# Altium PCB Front.PcbDoc
Units mm, origin at the board's own origin, x right, y up, seen from the top; angles counter-clockwise.
Board outline 49.6 x 20 mm, 2 copper layers (Top Layer, Bottom Layer), stack 1.57 mm thick; 29 components, 36 nets, 182 pads, 202 vias.
Unrouted connection lines stored in the file: 1.
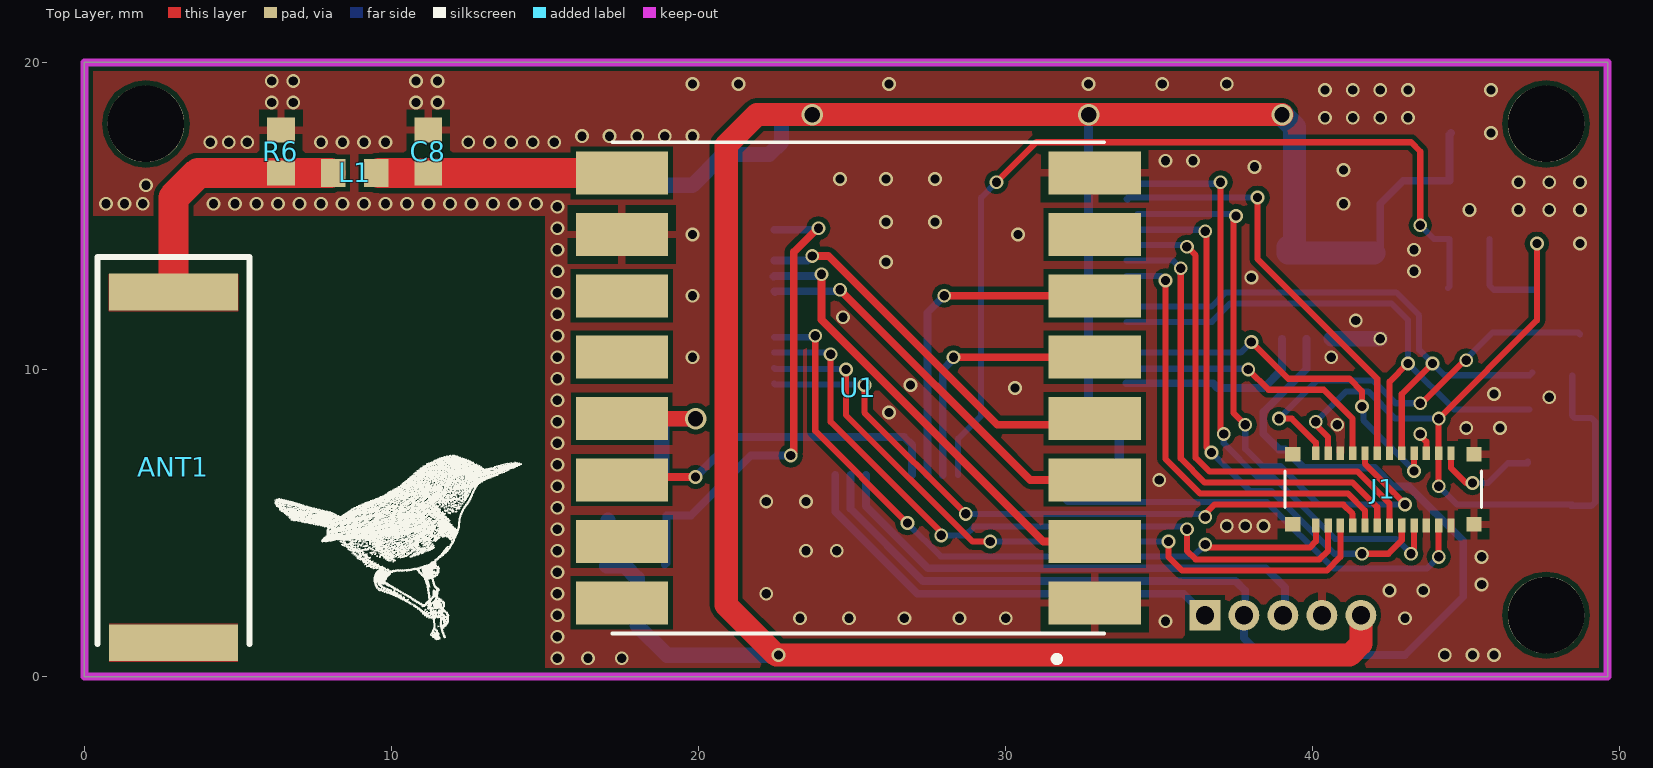
[diagram p0: Top Layer view]
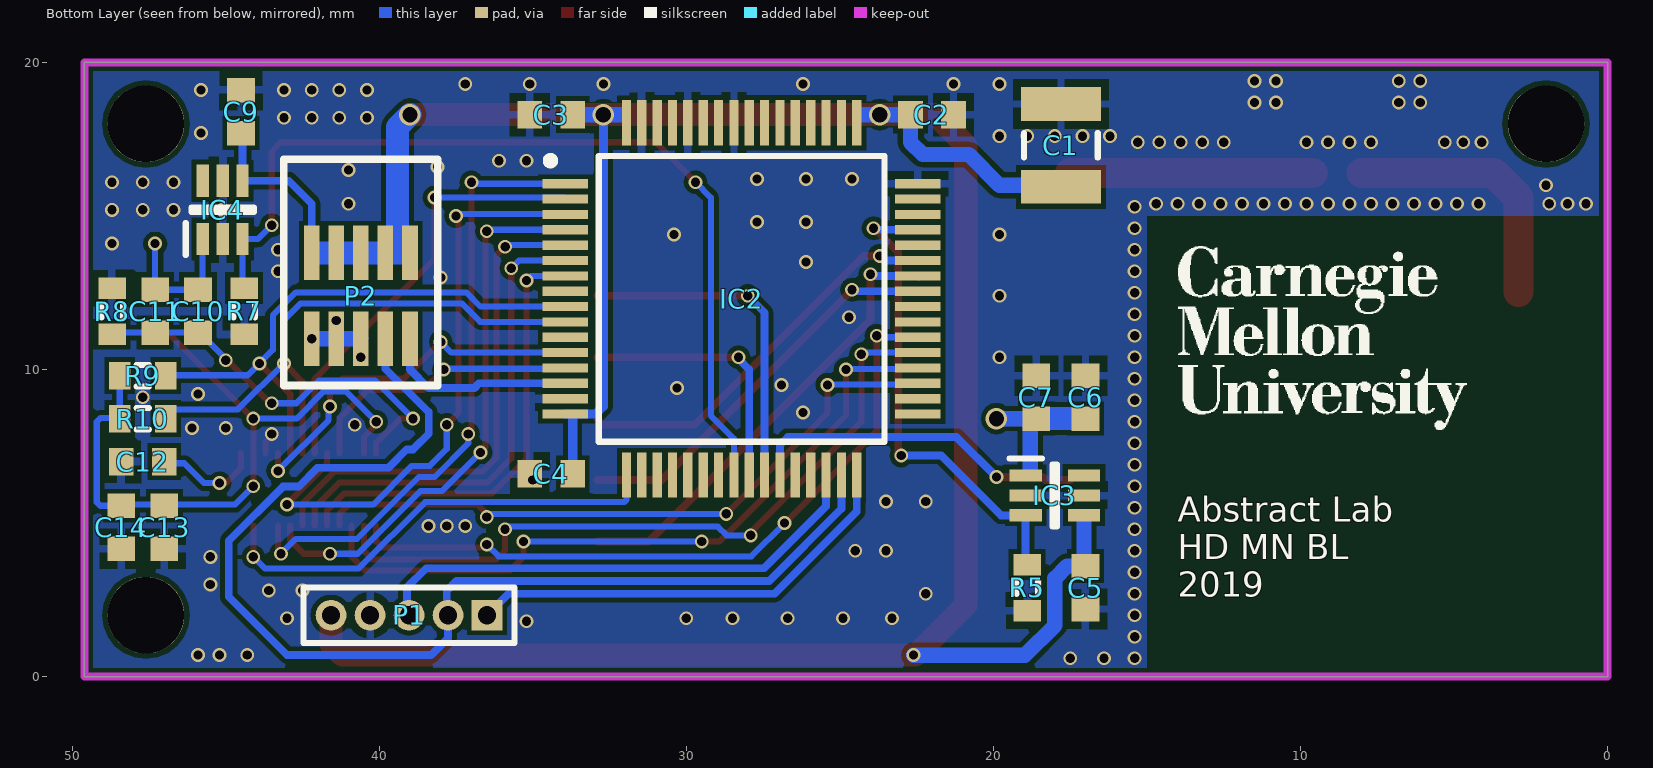
[diagram p1: Bottom Layer view, seen from below]

## Layer stack, top to bottom
Top Solder: solder mask 0.0102, Solder Resist, Dk 3.5
Top Layer: signal copper 0.035
Dielectric 1: dielectric 1.5, FR-4, Dk 3.9
Bottom Layer: signal copper 0.035
Bottom Solder: solder mask 0.0102, Solder Resist, Dk 3.5

## Board outline
0,0 49.6,0 49.6,20 0,20

## Design rules (kind name [scope] priority, off if disabled: settings)
Clearance [All] p1: gap=0.16 ignorepadtopadclearanceinfootprint=FALSE
MaxMinImpedance "Schematic Impedance Constraint_2" [InNet('NetANT1_1')] p1: minimum=50.00 maximum=50.00
MaxMinImpedance "Schematic Impedance Constraint" [InNet('ANT')] p2: minimum=50.00 maximum=50.00
MinimumSolderMaskSliver [All] p1: minsoldermaskwidth=0.16
PlaneClearance [All] p1: clearance=0.254
PlaneConnect [All] p1: pad.planeconnectstyle=Relief pad.reliefexpansion=0.508 pad.reliefentries=4 pad.reliefconductorwidth=0.254 pad.reliefairgap=0.254 via.planeconnectstyle=Direct via.reliefexpansion=0.508 via.reliefentries=4 via.reliefconductorwidth=0.254 via.reliefairgap=0.254
PolygonConnect [All] p1: thpad.connectstyle=Relief thpad.reliefconductorwidth=0.254 thpad.reliefentries=4 thpad.polygonreliefangle="90 Angle" thpad.airgapwidth=0.254 smdpad.connectstyle=Relief smdpad.reliefconductorwidth=0.254 smdpad.reliefentries=4 smdpad.polygonreliefangle="90 Angle" smdpad.airgapwidth=0.254 via.connectstyle=Direct via.reliefconductorwidth=0.254 via.reliefentries=4 via.polygonreliefangle="90 Angle" via.airgapwidth=0.254
RoutingVias [All] p1: holewidth=0.3 width=0.45 viastyle="Through Hole" minholewidth=0.3 minwidth=0.45 maxholewidth=6.5 maxwidth=5
SolderMaskExpansion [All] p1: expansion=0.102
Width CAM [InNet('Cam*') or InNet('AGND') or InNet('DVDD') or InNet('SCL')or InNet('SDA')] p1: maxlimit=1 minlimit=0.17 preferedwidth=0.2
Width MatchedLine [InNet('ANT') OR InNet('NetANT1_1')] p2: maxlimit=2 minlimit=0.254 preferedwidth=0.99
Width [All] p3: maxlimit=5 minlimit=0.16 preferedwidth=0.254
27 further rules are at their usual default settings.

## Components (designator, comment, footprint, x,y, rotation, side; value= is the part's Value field where it differs from the comment)
ANT1 "ACAG1204-868-T" ANTC12040X170N 2.9,6.815 r270 top
C1 "" C1210 17.8,17.3 r90 bottom value=10uF
C2 "Cap" 1608[0603] 22,18.3 r0 bottom value=100nF
C3 "Cap" 1608[0603] 34.4,18.3 r180 bottom value=100nF
C4 "Cap" 1608[0603] 34.4,6.6 r180 bottom value=100nF
C5 "Cap" 1608[0603] 17,2.9 r90 bottom value=10uF
C6 "Cap" 1608[0603] 17,9.1 r270 bottom value=10uF
C7 "Cap" 1608[0603] 18.6,9.1 r270 bottom value=1uF
C8 "" 1608[0603] 11.2,17.1 r270 top value=3.9pF
C9 "Cap" 1608[0603] 44.5,18.4 r270 bottom value=10uF
C10 "Cap" 1608[0603] 45.9,11.9 r90 bottom value=0.1uF
C11 "Cap" 1608[0603] 47.3,11.9 r90 bottom value=10uF
C12 "Cap" 1608[0603] 47.7,7 r180 bottom value=0.1uF
C13 "Cap" 1608[0603] 47,4.863 r90 bottom value=0.1uF
C14 "Cap" 1608[0603] 48.4,4.863 r90 bottom value=10uF
IC2 "MSP430FR5994IPM" QFP50P1200X1200X160-64N 28.2,12.3 r180 bottom
IC3 "SIP32431DR3-T1GE3" SOT65P210X110-6N 18,5.9 r180 bottom
IC4 "SIP32431DR3-T1GE3" SOT65P210X110-6N 45.1,15.2 r90 bottom
J1 "503772-2420" 5037722410 42.3,6.1 r0 top
L1 "" 1608[0603] 8.8,16.4 r180 top value=4.7nH
P1 "Header 5" MHDR1X5 36.49,2 r0 bottom
P2 "Header 5X2" FTE-105-03-X-DH 40.6,12.4 r0 bottom
R5 "Res3" J1-0603 18.9,2.9 r90 bottom value=2M
R6 "" 1608[0603] 6.4,17.1 r270 top value=NP
R7 "Res3" J1-0603 44.4,11.9 r90 bottom value=2M
R8 "Res3" J1-0603 48.7,11.9 r90 bottom value=0
R9 "Res3" J1-0603 47.7,9.8 r0 bottom value=4.7k
R10 "Res3" J1-0603 47.7,8.4 r0 bottom value=4.7k
U1 "RFM95W-915S2" *XCVR_RFM69HW-868S2 25.2,9.4 r180 top

## Footprints (in the part's own frame and the unit in brackets; to place one, negate y for a bottom-side part, rotate by r counter-clockwise, add the part's x,y. Pads: shape width x height; smd on the part's side, far side on the other; paste and mask are expansions set on the pad)
1608[0603] [mm] "Chip Capacitor, Body 1.6x0.8mm, IPC High Density"
  rect 0.8x0.9 smd: 1(-0.7,0) 2(0.7,0)
  body extent -0.87,-0.48 0.87,0.48, height 1.3
5037722410 [mm]
  rect 0.24x0.45 smd: 1(-2.2,-1.175) 2(-2.2,1.175) 3(-1.8,-1.175) 4(-1.8,1.175) 5(-1.4,-1.175) 6(-1.4,1.175) 7(-1,-1.175) 8(-1,1.175) 9(-0.6,-1.175) 10(-0.6,1.175) 11(-0.2,-1.175) 12(-0.2,1.175) 13(0.2,-1.175) 14(0.2,1.175) 15(0.6,-1.175) 16(0.6,1.175) 17(1,-1.175) 18(1,1.175) 19(1.4,-1.175) 20(1.4,1.175) 21(1.8,-1.175) 22(1.8,1.175) 23(2.2,-1.175) 24(2.2,1.175)
  rect 0.5x0.47 smd: FN1(-2.95,1.145) FN2(-2.95,-1.145) FN3(2.95,-1.145) FN4(2.95,1.145)
  silkscreen extent -3.2,-0.6 3.2,0.6
*XCVR_RFM69HW-868S2 [mm]
  rect 3x1.4 smd: 1(-7.7,7) 2(-7.7,5) 3(-7.7,3) 4(-7.7,1) 5(-7.7,-1) 6(-7.7,-3) 7(-7.7,-5) 8(-7.7,-7) 9(7.7,-7) 10(7.7,-5) 11(7.7,-3) 12(7.7,-1) 13(7.7,1) 14(7.7,3) 15(7.7,5) 16(7.7,7)
  silkscreen extent -8,-8 8,8.93, body extent -8,-8 8,8, height 2.04
ANTC12040X170N [mm]
  rect 1.2x4.2 smd: 1(-5.715,0) 2(5.715,0)
  silkscreen extent -6.85,-2.47 5.75,2.47, body extent -6,-2 6,2, height 1.7
C1210 [mm] "Chip Capacitor, Body 3.2x2.5mm, IPC High Density"
  rect 1.1x2.6 smd: 1(-1.35,0) 2(1.35,0)
  silkscreen extent -0.4,-1.2 0.4,1.2, body extent -1.7,-1.35 1.7,1.35, height 1.3
FTE-105-03-X-DH [mil]
  rect 20x70 smd mask+2: 1(-63,-55) 2(-63,55) 3(-31.5,-55) 4(-31.5,55) 5(0,-55) 6(0,55) 7(31.5,-55) 8(31.5,55) 9(63,-55) 10(63,55)
  silkscreen extent -99,-175 99,115, body extent -79,-300 79,75, height 120
J1-0603 [mm] "Chip Resistor, Body 1.6x0.8mm, IPC High Density"
  rect 0.7x0.9 smd: 1(-0.75,0) 2(0.75,0)
  silkscreen extent -0.2,-0.35 0.2,0.35, body extent -0.85,-0.48 0.85,0.48, height 0.9
MHDR1X5 [mm] "Connector; Header; 5 Position"
  rect 1x1 hole 0.6: 1(0,0)
  round 1 hole 0.6: 2(1.27,0) 3(2.54,0) 4(3.81,0) 5(5.08,0)
  silkscreen extent -0.9,-0.9 5.98,0.9
QFP50P1200X1200X160-64N [mm]
  rect 1.475x0.3 smd: 1(-5.738,3.75) 2(-5.738,3.25) 3(-5.738,2.75) 4(-5.738,2.25) 5(-5.738,1.75) 6(-5.738,1.25) 7(-5.738,0.75) 8(-5.738,0.25) 9(-5.738,-0.25) 10(-5.738,-0.75) 11(-5.738,-1.25) 12(-5.738,-1.75) 13(-5.738,-2.25) 14(-5.738,-2.75) 15(-5.738,-3.25) 16(-5.738,-3.75) 33(5.738,-3.75) 34(5.738,-3.25) 35(5.738,-2.75) 36(5.738,-2.25) 37(5.738,-1.75) 38(5.738,-1.25) 39(5.738,-0.75) 40(5.738,-0.25) 41(5.738,0.25) 42(5.738,0.75) 43(5.738,1.25) 44(5.738,1.75) 45(5.738,2.25) 46(5.738,2.75) 47(5.738,3.25) 48(5.738,3.75)
  rect 0.3x1.475 smd: 17(-3.75,-5.738) 18(-3.25,-5.738) 19(-2.75,-5.738) 20(-2.25,-5.738) 21(-1.75,-5.738) 22(-1.25,-5.738) 23(-0.75,-5.738) 24(-0.25,-5.738) 25(0.25,-5.738) 26(0.75,-5.738) 27(1.25,-5.738) 28(1.75,-5.738) 29(2.25,-5.738) 30(2.75,-5.738) 31(3.25,-5.738) 32(3.75,-5.738) 49(3.75,5.738) 50(3.25,5.738) 51(2.75,5.738) 52(2.25,5.738) 53(1.75,5.738) 54(1.25,5.738) 55(0.75,5.738) 56(0.25,5.738) 57(-0.25,5.738) 58(-0.75,5.738) 59(-1.25,5.738) 60(-1.75,5.738) 61(-2.25,5.738) 62(-2.75,5.738) 63(-3.25,5.738) 64(-3.75,5.738)
  silkscreen extent -6.35,-4.65 4.65,4.65, body extent -6,-6 6,6, height 1.6
SOT65P210X110-6N [mm]
  rect 1.05x0.4 smd: 1(-0.95,0.65) 2(-0.95,0) 3(-0.95,-0.65) 4(0.95,-0.65) 5(0.95,0) 6(0.95,0.65)
  silkscreen extent -1.48,-1.01 0.08,1.2, body extent -1.05,-1.01 1.05,1.01, height 1.1

## Part data
ANT1: "Antenna", Manufacturer_Name=ABRACON, Mouser Part Number=815-G1204-868-T, Datasheet Link=https://componentsearchengine.com/Datasheets/1/ACAG1204-868-T.pdf, Height=1.7mm, Manufacturer_Part_Number=ACAG1204-868-T, Mouser Price/Stock=https://www.mouser.com/Search/Refine.aspx?Keyword=815-G1204-868-T
C1: library part "Cap Pol3", "Polarized Capacitor (Surface Mount)", LatestRevisionDate=29-May-2009, LatestRevisionNote="IPC-7351 Footprint Added.", PackageDescription="Chip Capacitor", PackageReference=C0805, Published=8-Jun-2000, Publisher="Altium Limited"
C2 C3 C4 C5 C6 C7 C9 C10 C11 C12 C13 C14: "CAP CER 6.3V X5R/X7R 0603", PackageDescription="Chip Capacitor, Body 1.6x0.8mm, IPC High Density", PackageReference=0603, Publisher="Altium Limited"
C8: library part Cap, "Capacitor", LatestRevisionDate=17-Jul-2002, LatestRevisionNote="Re-released for DXP Platform.", PackageDescription="Radial Cap, Thru-Hole; 2 Leads; 0.3 in Pin Spacing", PackageReference=RAD-0.3, Published=8-Jun-2000, Publisher="Altium Limited"
IC2: "Integrated Circuit", Manufacturer_Name="Texas Instruments", Mouser Part Number=595-MSP430FR5994IPM, Datasheet Link=http://www.ti.com/lit/gpn/msp430fr5994, Height=1.6mm, Manufacturer_Part_Number=MSP430FR5994IPM, Mouser Price/Stock=https://www.mouser.com/Search/Refine.aspx?Keyword=595-MSP430FR5994IPM
IC3 IC4: "10 pA, Ultra Low Leakage and Quiescent Current, / Load Switch with Reverse Blocking", Manufacturer_Name=Vishay, Mouser Part Number=781-SIP32431DR3-GE3, ComponentLink1Description=Datasheet, ComponentLink1URL=https://www.vishay.com/docs/66597/sip32431.pdf, ComponentLink2Description="Package Specification", ComponentLink2URL=https://www.vishay.com/docs/71154/71154.pdf, ComponentLink3Description="Manufacturer URL", ComponentLink3URL=https://www.vishay.com, Datasheet Link=https://componentsearchengine.com/Datasheets/1/SIP32431DR3-T1GE3.pdf, Height=1.1mm, Manufacturer_Part_Number=SIP32431DR3-T1GE3, Mouser Price/Stock=https://www.mouser.com/Search/Refine.aspx?Keyword=781-SIP32431DR3-GE3
J1: library part 503772-2410, "SlimStack Board-to-Board Connector. 0.40mm Pitch, B8 Series, Receptacle, 0.80mm Mated Height, 2.50mm Mated Width, 24 Circuits", Manufacturer_Name=Molex, Mouser Part Number=538-503772-2410, ComponentLink1Description="Package Specification", ComponentLink1URL=https://www.molex.com/pdm_docs/sd/5037722420_sd.pdf, ComponentLink2Description="Manufacturer URL", ComponentLink2URL=https://www.molex.com, ComponentLink3Description=Datasheet, ComponentLink3URL=https://www.molex.com/webdocs/datasheets/pdf/en-us/5037722420_PCB_RECEPTACLES.pdf, Datasheet Link=https://componentsearchengine.com/Datasheets/1/503772-2410.pdf, Height=0.76mm, Manufacturer_Part_Number=503772-2410, Mouser Price/Stock=https://www.mouser.com/Search/Refine.aspx?Keyword=538-503772-2410
L1: library part Inductor, "Inductor", Code_IEC=1005, Code_JEITA=0402, LatestRevisionDate=29-May-2009, LatestRevisionNote="IPC-7351 Footprint Added.", PackageDescription="Chip Inductor", PackageReference=0402-A, Published=8-Jun-2000, Publisher="Altium Limited"
P1: "Header, 5-Pin", LatestRevisionDate=17-Jul-2002, LatestRevisionNote="Re-released for DXP Platform.", Publisher="Altium Limited"
P2: "Header, 5-Pin, Dual row", LatestRevisionDate=17-Jul-2002, LatestRevisionNote="Re-released for DXP Platform.", Publisher="Altium Limited"
R5 R7 R8 R9 R10: "RES 1/10W 1% 0603 SMD", PackageDescription="Chip Resistor, Body 1.6x0.8mm, IPC High Density", PackageReference=0603, Publisher="Altium Limited"
R6: library part Res3, "Resistor", LatestRevisionDate=29-May-2009, LatestRevisionNote="IPC-7351 Footprint Added.", PackageDescription="Chip Resistor", PackageReference=J1-0603, Published=8-Jun-2000, Publisher="Altium Limited"
U1: "RFM95W LoRA Transceiver Module 915MHz", Package="SMD-16 RF Solutions", Availability=Unavailable, MF="RF Solutions", MP=RFM95W-915S2, Price=None, SnapEDA_Link=https://www.snapeda.com/parts/RFM95W-915S2/RF%20Solutions/view-part/?ref=snap

## Free pads (board coordinates)
  round 2.5 hole 2.5 unplated: 1(2,18) 2(47.6,18) 3(47.6,2)

## Via types
v1: diameter 0.45, hole 0.3, Top Layer to Bottom Layer, tented both sides, 198 vias
v2: diameter 0.7, hole 0.5, Top Layer to Bottom Layer, tented both sides, 4 vias

## Nets (pads, with @x,y where several pads share a name; then routed paths per layer and width w, separated by ;. In a path a pad name is that pad's centre, name@x,y a point inside that pad or via, vN(x,y) a via of type N, cw(c..) or ccw(c..) an arc to the next point about the centre after c; other vN are vias at no path point)
AGND: C10.1 C11.1 J1.2 R8.1 | length 13.5
  Top Layer w0.2: v1(38.9,8.4) 39.314,8.4 40.1,7.614 J1.2 ; v1(43.5,8.9) 43.55,8.9 44.95,10.3 v1(45,10.3)
  Bottom Layer w0.2: v1(38.9,8.4) 40.145,9.645 41.95,9.645 42.695,8.9 v1(43.5,8.9) ; v1(45,10.3) 45,10.35 45.85,11.2 C10.1 48.65,11.2 R8.1
ANT: C8.2 L1.1 U1.9 | length 7.9
  Top Layer w0.99: L1.1@9.6,16.4 C8.2 U1.9
CAM_CLK: IC2.17 J1.21 | length 15.1
  Top Layer w0.2: v1(44.1,3.9) J1.21
  Bottom Layer w0.2: IC2.17 31.95,5.75 32.015,5.685 38.506,5.685 40.676,3.515 43.715,3.515 v1(44.1,3.9)
CAM_D0: IC2.4 J1.15 | length 18.1
  Top Layer w0.2: v1(36.5,14.5) 36.545,14.455 36.545,7.455 v1(36.7,7.3) ; v1(41.6,4) 42.461,4 42.9,4.439 J1.15
  Bottom Layer w0.2: IC2.4 36.45,14.55 v1(36.5,14.5) ; v1(36.7,7.3) 37.955,6.045 38.655,6.045 40.7,4 v1(41.6,4)
CAM_D1: IC2.5 J1.13 | length 16.6
  Top Layer w0.2: v1(35.9,14) 36.185,13.715 36.185,7.129 36.634,6.68 41.447,6.68 42.5,5.627 J1.13
  Bottom Layer w0.2: IC2.5 35.85,14.05 v1(35.9,14)
CAM_D2: IC2.6 J1.11 | length 15.7
  Top Layer w0.2: v1(35.7,13.3) 35.7,7.105 36.485,6.32 41.298,6.32 42.1,5.518 J1.11
  Bottom Layer w0.2: IC2.6 35.45,13.55 v1(35.7,13.3)
CAM_D3: IC2.7 J1.9 | length 14.8
  Top Layer w0.2: v1(35.2,12.9) 35.2,7.096 36.336,5.96 41.149,5.96 41.7,5.409 J1.9
  Bottom Layer w0.2: IC2.7 35.05,13.05 v1(35.2,12.9)
CAM_D4: IC2.35 J1.7 | length 21.9
  Top Layer w0.2: v1(25.4,9.5) 25.4,8.6 v1(28.7,5.3) ; v1(36.5,5.2) 36.5,5.3 36.8,5.6 41,5.6 41.3,5.3 J1.7
  Bottom Layer w0.2: IC2.35 22.497,9.515 25.385,9.515 v1(25.4,9.5) ; v1(28.7,5.3) 36.4,5.3 v1(36.5,5.2)
CAM_D5: IC2.36 J1.5 | length 23.5
  Top Layer w0.2: v1(24.8,10) 24.8,8.514 28.914,4.4 v1(29.5,4.4) ; v1(35.3,4.4) 35.3,3.9 35.745,3.455 40.455,3.455 40.9,3.9 J1.5
  Bottom Layer w0.2: IC2.36 22.497,10.015 24.785,10.015 v1(24.8,10) ; v1(29.5,4.4) v1(35.3,4.4)
CAM_D6: IC2.37 J1.3 | length 23.8
  Top Layer w0.2: v1(24.3,10.5) 24.3,8.3 27.9,4.7 v1(27.9,4.6) ; v1(35.9,4.8) 35.9,4.1 36.185,3.815 40.215,3.815 40.5,4.1 J1.3
  Bottom Layer w0.2: IC2.37 24.25,10.55 v1(24.3,10.5) ; v1(27.9,4.6) 28.686,4.6 28.971,4.885 35.815,4.885 v1(35.9,4.8)
CAM_D7: IC2.38 J1.1 | length 23.3
  Top Layer w0.2: v1(23.8,11.1) 23.8,8 v1(26.8,5) ; v1(36.5,4.3) 36.6,4.2 39.9,4.2 40.1,4.4 J1.1
  Bottom Layer w0.2: IC2.38 23.75,11.05 v1(23.8,11.1) ; v1(26.8,5) 27.885,3.915 36.115,3.915 v1(36.5,4.3)
CAM_EN: IC2.24 IC4.3 R7.2 | length 29.7
  Top Layer w0.2: v1(29.7,16.1) 31,17.4 43.2,17.4 43.5,17.1 v1(43.5,14.7)
  Bottom Layer w0.2: IC2.24 28.45,7.75 29.2,8.5 29.2,15.6 v1(29.7,16.1) ; v1(43.5,14.7) 43.95,14.25 IC4.3 44.45,12.7 R7.2
CAM_FVLD: IC2.3 J1.10 | length 19.2
  Top Layer w0.2: v1(37.5,15) 37.5,14.932 37.415,14.847 37.415,8.585 v1(37.8,8.2) ; J1.10 41.7,6.936 43,5.637 v1(43,5.6)
  Bottom Layer w0.2: IC2.3@34.3,15.06 37.44,15.06 v1(37.5,15) ; v1(37.8,8.2) 37.8,7.413 38.353,6.86 38.94,6.86 40.2,5.6 v1(43,5.6)
CAM_INTR: IC2.12 J1.18 | length 12.3
  Top Layer w0.2: v1(38,10.9) 39.2,9.7 41.2,9.7 41.6,9.3 v1(41.6,8.8) ; v1(43.3,6.7) J1.18
  Bottom Layer w0.2: IC2.12 37.65,10.55 v1(38,10.9) ; v1(41.6,8.8) 41.648,8.752 41.648,8.352 v1(43.3,6.7)
CAM_LVLD: IC2.2 J1.12 | length 14.3
  Top Layer w0.2: v1(38.2,15.6) 38.2,13.6 42.1,9.7 J1.12
  Bottom Layer w0.2: IC2.2@33.963,15.525 IC2.2 33.988,15.6 v1(38.2,15.6)
CAM_PCLK: IC2.1 J1.17 | length 20.2
  Top Layer w0.2: v1(37,16.1) 37,8 v1(37.1,7.9) ; v1(43.2,4) 43.2,4.068 43.3,4.168 J1.17
  Bottom Layer w0.2: IC2.1 36.95,16.05 v1(37,16.1) ; v1(37.1,7.9) 37.1,7.6 38.2,6.5 38.709,6.5 40.724,4.485 42.715,4.485 v1(43.2,4)
CAM_TRIG: IC2.13 J1.8 | length 9.2
  Top Layer w0.2: v1(37.9,10) 38.56,9.34 40.36,9.34 41.3,8.4 J1.8
  Bottom Layer w0.2: IC2.13 33.963,10.025 37.875,10.025 v1(37.9,10)
CAM_VCC: C10.2 C11.2 C13.2 C14.2 IC4.1 J1.4 J1.22 R9.2 R10.2 | length 30.1
  Top Layer w0.2: v1(40.1,8.3) 40.1,8.2 40.5,7.8 J1.4 ; v1(44.1,6.2) J1.22 v1(44.1,8.4) 47.3,11.6 v1(47.3,14.1)
  Bottom Layer w0.2: v1(40.1,8.3) 41.085,9.285 41.801,9.285 42.686,8.4 v1(44.1,8.4) ; v1(44.1,6.2) 44.7,5.6 48.463,5.6 C14.2@48.5,5.563 ; IC4.1 45.75,12.75 C10.2 C11.2 v1(47.3,14.1) ; C14.2 C14.2@48.5,5.563 ; R9.2 48.45,8.5 48.533,8.417 49.083,8.417 49.2,8.3 49.2,5.68 49.083,5.563 C14.2@48.5,5.563
DVDD: C12.2 J1.24 | length 3.5
  Top Layer w0.2: J1.24 44.5,6.8 45,6.3 v1(45.2,6.3)
  Bottom Layer w0.2: v1(45.2,6.3) 45.7,6.3 46.35,6.95 47,6.95 C12.2
GND: C1.2 C2.1 C3.1 C4.1 C5.1 C6.1 C7.1 C8.1 C9.1 C12.1 C13.1 C14.1 IC2.15 IC2.48 IC2.57 IC2.60 IC2.63 IC3.2 IC3.5 IC4.2 IC4.5 J1.6 J1.19 J1.20 J1.23 J1.FN1 J1.FN2 J1.FN3 J1.FN4 P1.4 P2.6 P2.8 P2.10 R5.1 R6.1 R7.1 R8.2 U1.1 U1.8 U1.10 | length 2.3
  Top Layer w0.2: v1@43.5,7.847 43.7,7.647 J1.20
  Top Layer w0.254: v1@43.5,7.847 v1(43.5,7.9)
  Bottom Layer w0.5: P2.6 P2.8 v1(42.2,11.003)
  other v1: 15.4,0.6 16.4,0.6 17.5,0.6 44.3,0.7 45.2,0.7 45.9,0.7 15.4,1.3 35.2,1.8 23.3,1.9 24.9,1.9 26.7,1.9 28.5,1.9 30,1.9 43,1.9 15.4,2 15.4,2.7 22.2,2.7 42.5,2.8 43.6,2.8 45.5,3 15.4,3.4 45.5,3.9 15.4,4.1 23.5,4.1 24.5,4.1 15.4,4.8 37.2,4.9 37.8,4.9 38.4,4.9 15.4,5.5 22.2,5.7 23.5,5.7 15.4,6.2 35,6.4 15.4,6.9 15.4,7.6 45,8.1 46.1,8.1 40.8,8.2 15.4,8.3 26.2,8.6 15.4,9 47.7,9.1 45.9,9.2 30.3,9.4 26.9,9.5 15.4,9.7 15.4,10.4 19.8,10.4 40.6,10.4 15.4,11.1 41.4,11.6 24.7,11.7 15.4,11.8 19.8,12.4 15.4,12.5 38,13 15.4,13.2 43.3,13.2 26.1,13.5 15.4,13.9 43.3,13.9 48.7,14.1 19.8,14.4 30.4,14.4 15.4,14.6 26.1,14.8 27.7,14.8 45.1,15.2 46.7,15.2 47.7,15.2 48.7,15.2 15.4,15.3 0.7,15.4 1.3,15.4 1.9,15.4 4.2,15.4 4.9,15.4 5.6,15.4 6.3,15.4 7,15.4 7.7,15.4 8.4,15.4 9.1,15.4 9.8,15.4 10.5,15.4 11.2,15.4 11.9,15.4 12.6,15.4 13.3,15.4 14,15.4 14.7,15.4 41,15.4 2,16 46.7,16.1 47.7,16.1 48.7,16.1 24.6,16.2 26.1,16.2 27.7,16.2 41,16.5 38.1,16.6 35.2,16.8 36.1,16.8 4.1,17.4 4.7,17.4 5.3,17.4 7.7,17.4 8.4,17.4 9.1,17.4 9.8,17.4 12.5,17.4 13.2,17.4 13.9,17.4 14.6,17.4 15.3,17.4 16.2,17.6 17.1,17.6 18,17.6 18.9,17.6 19.8,17.6 45.8,17.7 40.4,18.2 41.3,18.2 42.2,18.2 43.1,18.2 6.1,18.7 6.8,18.7 10.8,18.7 11.5,18.7 40.4,19.1 41.3,19.1 42.2,19.1 43.1,19.1 45.8,19.1 19.8,19.3 21.3,19.3 26.2,19.3 32.7,19.3 35.1,19.3 37.2,19.3 6.1,19.4 6.8,19.4 10.8,19.4 11.5,19.4
MSP_RST: IC2.31 P1.2 P2.4 | length 38.2
  Bottom Layer w0.254: IC2.31 24.95,5.465 27.301,3.114 37.486,3.114 37.8,2.8 37.8,2.04 P1.2 37.76,1.253 38.313,0.7 43,0.7 44.9,2.6 44.9,4.424 43.136,6.188 42.624,6.188 42.012,6.8 39.7,6.8 39.1,7.4 38.9,7.4 38.388,7.912 38.388,8.612 39.8,10.024 P2.4
NetANT1_1: ANT1.1 L1.2 R6.2 | length 8.5
  Top Layer w0.99: ANT1.1 2.9,15.6 3.7,16.4 R6.2 L1.2@8,16.4
RADIO_CS: IC2.25 U1.5 | length 8.6
  Top Layer w0.254: v1(28.3,10.4) U1.5
  Bottom Layer w0.254: IC2.25 27.95,9.997 28.3,10.347 v1(28.3,10.4)
RADIO_D0: IC2.27 U1.14 | length 11.1
  Top Layer w0.254: U1.14 18.3,6.4 18.4,6.5 v1(19.9,6.5)
  Bottom Layer w0.254: v1(19.9,6.5) 21.2,7.8 26.7,7.8 26.95,7.55 IC2.27
RADIO_EN: IC2.45 IC3.3 R5.2 | length 15.7
  Top Layer w0.254: v1(23,7.2) 23.1,7.3 23.1,13.824 23.876,14.6 v1(23.9,14.6)
  Bottom Layer w0.254: R5.2 18.95,3.7 IC3.3 19.75,5.25 21.7,7.2 v1(23,7.2) ; IC2.45 23.85,14.55 v1(23.9,14.6)
RADIO_MISO: IC2.42 U1.2 | length 15
  Top Layer w0.254: v1(24,13.1) 24,11.624 31.224,4.4 U1.2
  Bottom Layer w0.254: IC2.42@22.441,13.029 IC2.42 23.95,13.05 v1(24,13.1)
RADIO_MOSI: IC2.41 U1.3 | length 13.1
  Top Layer w0.254: v1(24.6,12.6) 30.8,6.4 U1.3
  Bottom Layer w0.254: IC2.41@22.485,12.527 IC2.41 24.55,12.55 v1(24.6,12.6)
RADIO_RST: IC2.26 U1.6 | length 11
  Top Layer w0.254: v1(28,12.4) U1.6
  Bottom Layer w0.254: IC2.26 27.45,11.85 v1(28,12.4)
RADIO_SCK: IC2.43 U1.4 | length 12.9
  Top Layer w0.254: v1(23.7,13.7) 24.224,13.7 29.724,8.2 32.7,8.2 U1.4
  Bottom Layer w0.254: IC2.43 23.55,13.55 v1(23.7,13.7)
RADIO_VCC: C6.2 C7.2 IC3.1 U1.13 | length 7.6
  Top Layer w0.5: U1.13@17.4,8.4 U1.13 v2(19.9,8.4)
  Bottom Layer w0.254: C7.2 18.604,8.4 C7.2@18.8,8.204 ; IC3.1@18.8,6.7 IC3.1
  Bottom Layer w0.5: C7.2@18.65,8.4 18.604,8.4 C7.2 18.75,8.55 18.9,8.4 v2(19.9,8.4) ; IC3.1@18.8,6.7 C7.2@18.8,8.204
  Bottom Layer w0.75: C6.2 C7.2
SBWTCK: IC2.30 P1.3 | length 16.2
  Bottom Layer w0.254: IC2.30 25.45,5.55 27.472,3.528 38.472,3.528 39.1,2.9 39.1,2.5
SCL: IC2.10 J1.14 R10.1 | length 18.8
  Top Layer w0.2: J1.14 42.5,9.6 v1(43.1,10.2)
  Bottom Layer w0.2: IC2.10 36.712,11.55 37.314,12.152 42.562,12.152 43.1,11.614 v1(43.1,10.2) 44.6,8.7 R10.1@47.05,8.7
SDA: IC2.9 J1.16 R9.1 | length 18.6
  Top Layer w0.2: J1.16 42.9,9.2 v1(43.9,10.2)
  Bottom Layer w0.2: IC2.9 36.703,12.05 37.165,12.512 42.711,12.512 43.46,11.763 43.46,10.64 44.285,9.815 47.065,9.815 R9.1@47.15,9.9
TPS_EN: IC2.14 P2.2 | length 6.4
  Bottom Layer w0.254: IC2.14 36.75,9.55 36.9,9.4 38.4,9.4 39,10 P2.2
UART_TX: IC2.32 P1.1 | length 14.6
  Bottom Layer w0.254: IC2.32 24.45,5.379 27.129,2.7 35.79,2.7 P1.1
VCC: C1.1 C2.2 C3.2 C4.2 C5.2 C9.2 IC2.16 IC2.49 IC2.64 IC3.4 IC4.4 P1.5 P2.1 P2.3 P2.5 P2.7 P2.9 | length 100.8
  Top Layer w0.75: v2(39,18.3) v2(32.7,18.3) v2(23.7,18.3) 21.9,18.3 20.9,17.3 20.9,2.33 22.53,0.7 v1(22.6,0.7) 41.2,0.7 41.57,1.07 P1.5
  Bottom Layer w0.254: C5.2 C5.2@17.05,3.65 ; P2.1@39.2,13.997 39.4,14.197 ; P2.9@42.2,13.8 42.2,15.4 42.95,16.15 IC4.4 44.45,17.65 C9.2
  Bottom Layer w0.3: v2(32.7,18.3) 32.7,8.8 32.95,8.55 IC2.16@33.7,8.55 ; C4.2 IC2.16@33.7,8.55 ; IC2.16 IC2.16@33.7,8.55
  Bottom Layer w0.5: C5.2 17.6,3.6 18,3.2 18,1.67 18.97,0.7 v1(22.6,0.7) ; C5.2@17.05,3.65 IC3.4@17.05,5.1 ; C1.1@17.8,16.15 17.95,16 19.8,16 20.8,17 22.3,17 22.7,17.4 C2.2 24.188,18.3 IC2.49@24.3,18.3 ; 32.1,18.3 32.212,18.3 C3.2
  Bottom Layer w0.75: v2(39,18.3) 39.4,17.9 39.4,14.197 ; P2.1@39.2,13.997 39.2,13.797 P2.3 P2.5 P2.7 P2.9@42,13.797
pads on no net: ANT1.2 IC2.8 IC2.11 IC2.18 IC2.19 IC2.20 IC2.21 IC2.22 IC2.23 IC2.28 IC2.29 IC2.33 IC2.34 IC2.39 IC2.40 IC2.44 IC2.46 IC2.47 IC2.50 IC2.51 IC2.52 IC2.53 IC2.54 IC2.55 IC2.56 IC2.58 IC2.59 IC2.61 IC2.62 IC3.6 IC4.6 U1.7 U1.11 U1.12 U1.15 U1.16

## Polygon pours and split planes (outlines as drawn)
GND on Top Layer "Top Layer-GND" (solid, pour order 16): 0,15 0,20 49.6,20 49.6,0 15,0 15,15
no net on Top Layer "Top Layer-No Net 2" (solid, pour order 10): 0.8,11.9 0.8,13.1 5,13.1 5,11.9
no net on Top Layer "Top Layer-No Net 6" (solid, pour order 0): 0.8,0.5 5,0.5 5,1.7 0.8,1.7
no net on Top Layer "Top Layer-No Net" (solid, pour order 14): 5,11.9
no net on Top Layer "Top Layer-No Net 1" (solid, pour order 12): 0.8,13.1
no net on Top Layer "Top Layer-No Net 3" (solid, pour order 8): 5,1.7
no net on Top Layer "Top Layer-No Net 4" (solid, pour order 6): 0.8,10.2
no net on Top Layer "Top Layer-No Net 5" (solid, pour order 4): 0.8,11.4
GND on Bottom Layer "Bottom Layer-GND" (solid, pour order 18): 0,15 0,20 49.6,20 49.6,0 15,0 15,15

## Keep-outs
Keep-Out Layer:
  lines w0.254: 0,0 0,20 8.577,20 26.077,20 49.6,20 49.6,0 0,0

## Other copper
Top Layer:
  pour cut-out: 0.8,1.7 0.8,11.9 5,11.9 5,1.7
  pour cut-out: 15,0 15,15 5,15 5,0
  pour cut-out: 0,0 0,0.5 15,0.5 15,0
  pour cut-out: 0,0 0.8,0 0.8,15 0,15

## Silkscreen, mask and mechanical layers (free items; w line width, h text height)
Top Overlay:
  drawing of 7095 lines, arcs and shapes, not listed
Bottom Overlay:
  drawing of 1894 lines, arcs and shapes, not listed
  text "Abstract Lab  / HD MN BL  / 2019" at 14,2.6 h0.81

## Text inside footprints (layer, text, board x,y; h text height)
P2: Mechanical 1 "J1" at 40.154,12.857 h0.76 r180